# EAGLE board FunctionGenerator (EAGLE 5.10)
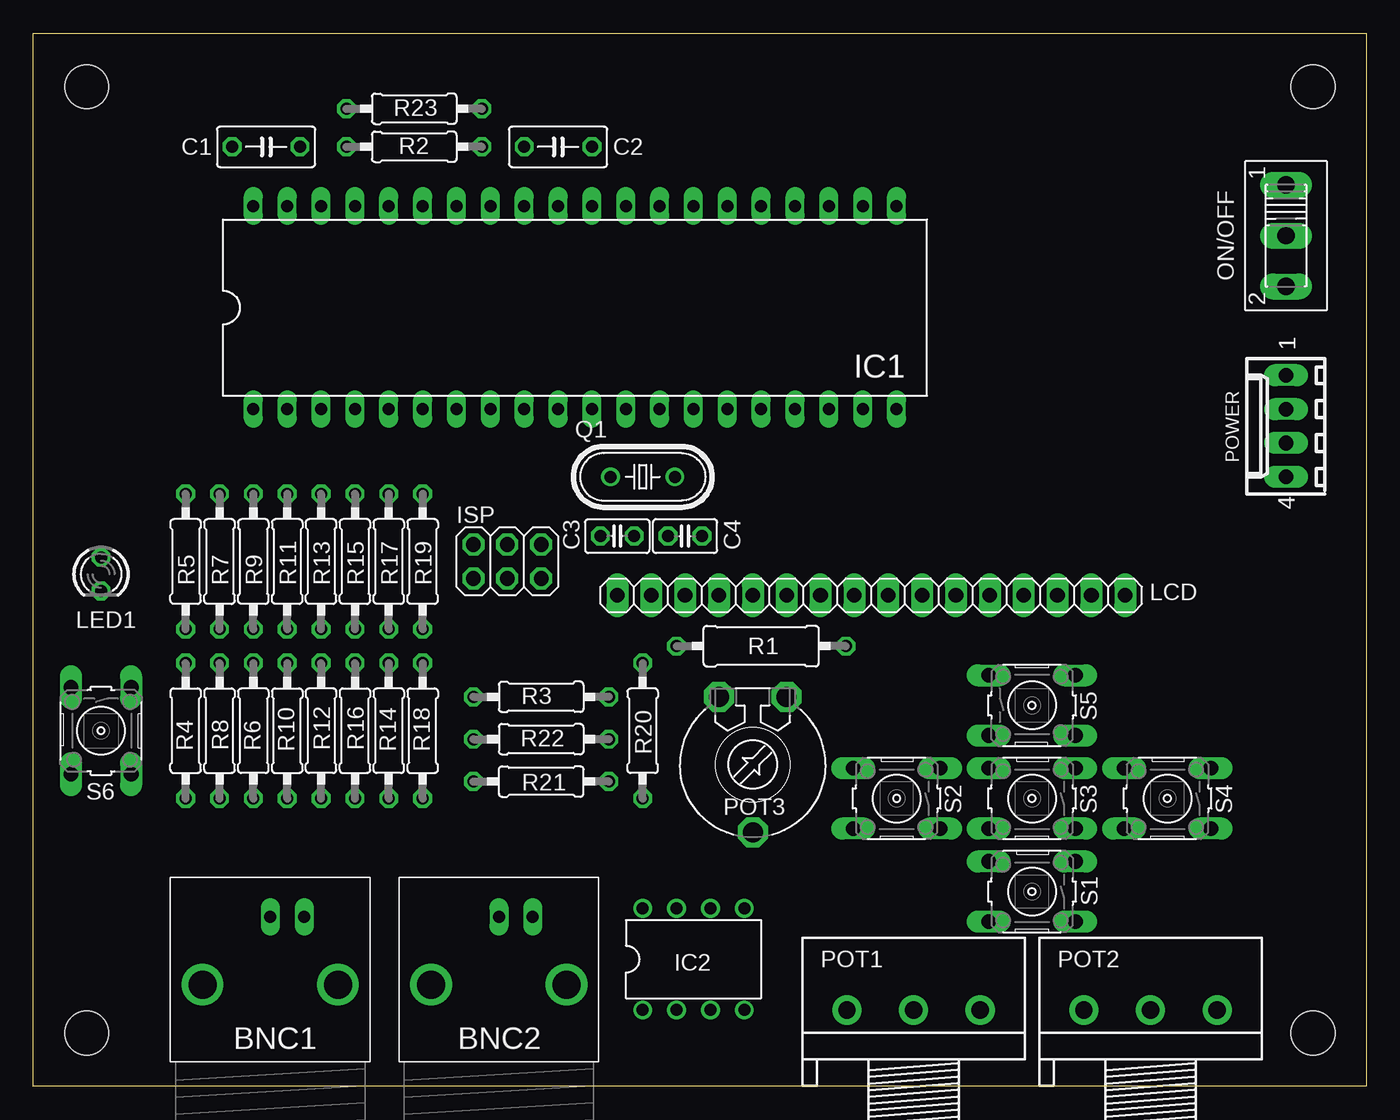
[diagram p0: board, top side]
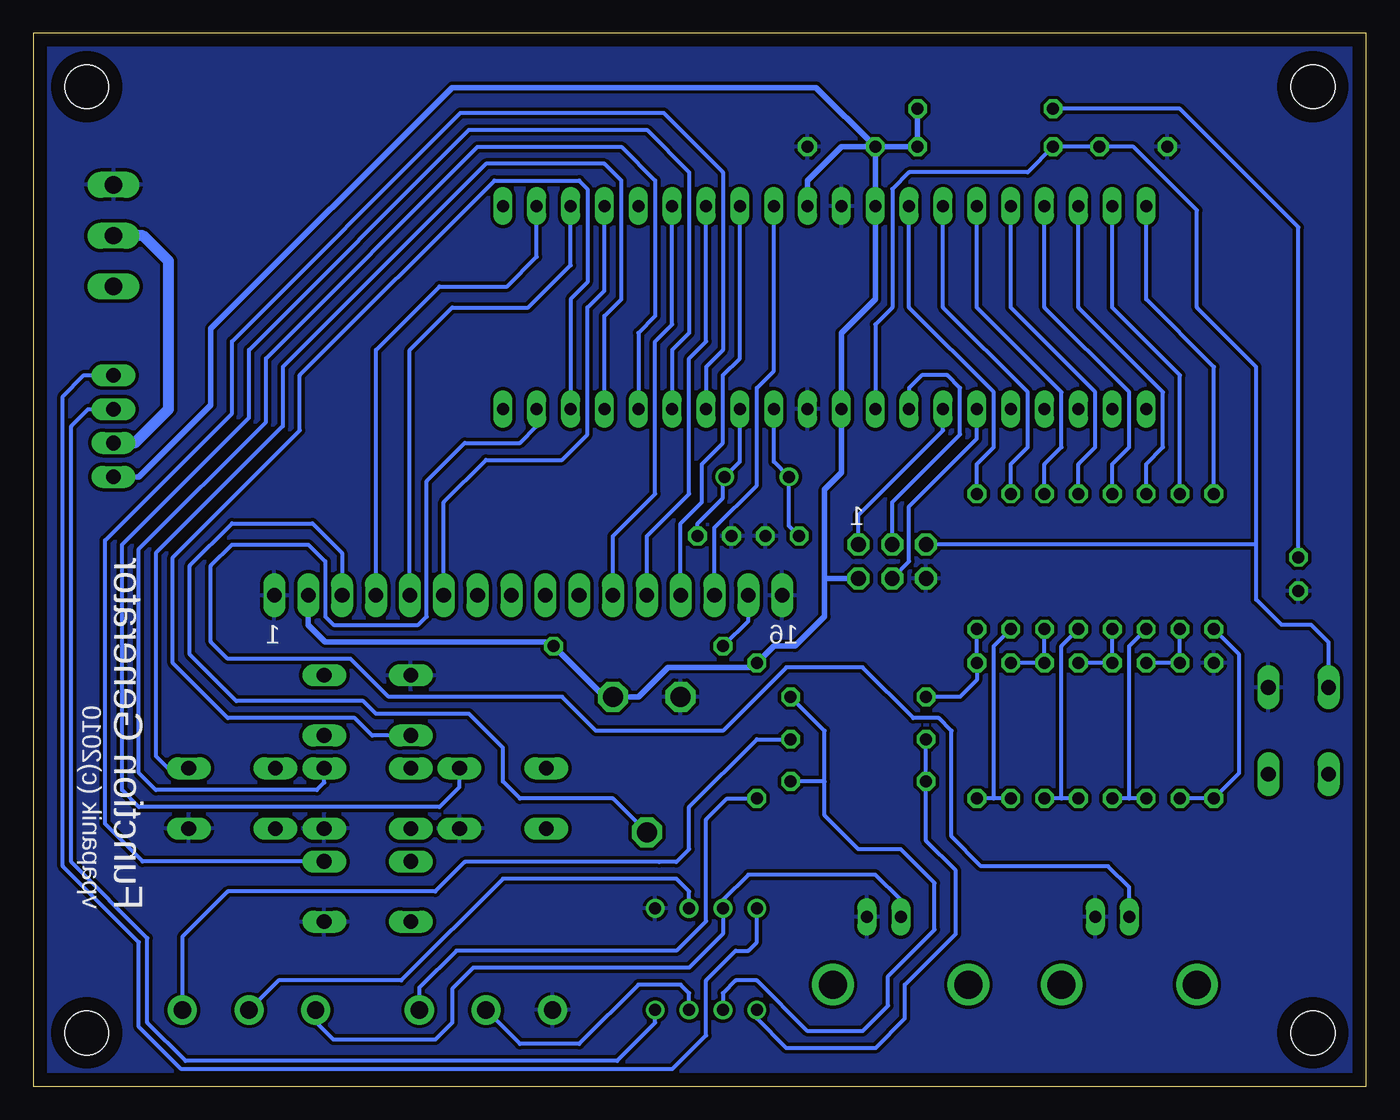
[diagram p1: board, bottom side, seen from below]

Size 100 x 79 mm. Coordinates in mm from the lower left corner, seen from the top.
Outline: 0,79 100,79 100,0 0,0 0,79
Copper layers (1*16): Top 0.035mm / dielectric 1.5mm / Bottom 0.035mm
Design rules "OLIMEX_10mils": minimum track width 10mil, minimum drill 24mil, track to track 10mil, track to pad 10mil, pad to pad 10mil, via to via 10mil, smd to smd 10mil, copper to edge 40mil, drill to drill 10mil, minimum pad ring 10mil, minimum via ring 8mil, stop-mask expansion 0mil, vias tented up to drill 0mil, thermal gap 10mil
Holes 3.3 mm at 4,75 96,75 96,4 4,4

## Footprints (pad centres in the part's own frame; a part is rotated, then mirrored left to right if it is on the bottom)
BNC = drill 2.1 round: 3 -5.08,5.08; 4 5.08,5.08 | drill 0.9 long: GND -2.54,0; S 0,0
C050-030X075 = drill 0.9 octagon: 1 -2.54,0; 2 2.54,0
C025-025X050 = drill 0.9 octagon: 1 -1.27,0; 2 1.27,0
DIL40 = drill 0.9 long: 1 -24.13,-7.62; 2 -21.59,-7.62; 3 -19.05,-7.62; 4 -16.51,-7.62; 5 -13.97,-7.62; 6 -11.43,-7.62; 7 -8.89,-7.62; 8 -6.35,-7.62; 9 -3.81,-7.62; 10 -1.27,-7.62; 11 1.27,-7.62; 12 3.81,-7.62; 13 6.35,-7.62; 14 8.89,-7.62; 15 11.43,-7.62; 16 13.97,-7.62; 17 16.51,-7.62; 18 19.05,-7.62; 19 21.59,-7.62; 20 24.13,-7.62; 21 24.13,7.62; 22 21.59,7.62; 23 19.05,7.62; 24 16.51,7.62; 25 13.97,7.62; 26 11.43,7.62; 27 8.89,7.62; 28 6.35,7.62; 29 3.81,7.62; 30 1.27,7.62; 31 -1.27,7.62; 32 -3.81,7.62; 33 -6.35,7.62; 34 -8.89,7.62; 35 -11.43,7.62; 36 -13.97,7.62; 37 -16.51,7.62; 38 -19.05,7.62; 39 -21.59,7.62; 40 -24.13,7.62
DIL08 = drill 0.9 pad 1.27 round: 1 -3.81,-3.81; 2 -1.27,-3.81; 3 1.27,-3.81; 4 3.81,-3.81; 5 3.81,3.81; 6 1.27,3.81; 7 -1.27,3.81; 8 -3.81,3.81
2X03 = drill 1.1 octagon: 1 -2.54,-1.27; 2 -2.54,1.27; 3 0,-1.27; 4 0,1.27; 5 2.54,-1.27; 6 2.54,1.27
1X16 = drill 1.1 long: 1 -19.05,0; 2 -16.51,0; 3 -13.97,0; 4 -11.43,0; 5 -8.89,0; 6 -6.35,0; 7 -3.81,0; 8 -1.27,0; 9 1.27,0; 10 3.81,0; 11 6.35,0; 12 8.89,0; 13 11.43,0; 14 13.97,0; 15 16.51,0; 16 19.05,0
LED3MM = drill 0.9 octagon: A -1.27,0; K 1.27,0
255SB = drill 1.3 long: 1 -3.81,0; 2 0,0; 3 3.81,0
3RP/1610N = drill 1.3 pad 2.184 round: 1 -5,0; 2 0,0; 3 5,0
LI10 = drill 1.5 octagon: A -2.54,-5.08; E 2.54,-5.08; S 0,5.08
6410-04 = drill 1.1 long: 1 3.81,0; 2 1.27,0; 3 -1.27,0; 4 -3.81,0
HC49U-V = drill 0.9 round: 1 -2.413,0; 2 2.413,0
0309/12 = drill 0.9 octagon: 1 -6.35,0; 2 6.35,0
0207/10 = drill 0.9 octagon: 1 -5.08,0; 2 5.08,0
B3F-10XX = drill 1.1 long: 1 -3.251,2.261; 2 3.251,2.261; 3 -3.251,-2.261; 4 3.251,-2.261

## Placement (x,y rotation side)
BNC1  BNCPTH  [BNC]  17.78,12.7 180 top
BNC2  BNCPTH  [BNC]  34.92,12.7 180 top
C1  0.1u  [C050-030X075]  17.46,70.48 0 top
C2  0.1u  [C050-030X075]  39.37,70.48 0 top
C3  18pF  [C025-025X050]  43.81,41.27 0 top
C4  18pF  [C025-025X050]  48.9,41.27 180 top
IC1  MEGA16-P  [DIL40]  40.64,58.42 0 top
IC2  LM358N  [DIL08]  49.53,9.53 0 top
ISP  [2X03]  35.56,39.37 180 top
LCD  [1X16]  62.87,36.83 180 top
LED1  GREEN  [LED3MM]  5.08,38.42 270 top
ON/OFF  [255SB]  93.98,63.82 270 top
POT1  1K  [3RP/1610N]  66.04,5.71 0 top
POT2  47K  [3RP/1610N]  83.82,5.71 0 top
POT3  10k  [LI10]  53.98,24.13 180 top
POWER  [6410-04]  93.98,49.53 90 top
Q1  16 MHz  [HC49U-V]  45.72,45.72 0 top
R1  470  [0309/12]  54.61,33.02 0 top
R2  10k  [0207/10]  28.57,70.48 180 top
R3  100k  [0207/10]  38.1,29.21 180 top
R4  20k  [0207/10]  11.43,26.67 270 top
R5  20k  [0207/10]  11.43,39.37 90 top
R6  10k  [0207/10]  13.97,26.67 270 top
R7  20k  [0207/10]  13.97,39.37 90 top
R8  10k  [0207/10]  16.51,26.67 90 top
R9  20k  [0207/10]  16.51,39.37 90 top
R10  10k  [0207/10]  19.05,26.67 270 top
R11  20k  [0207/10]  19.05,39.37 90 top
R12  10k  [0207/10]  21.59,26.67 90 top
R13  20k  [0207/10]  21.59,39.37 90 top
R14  10k  [0207/10]  24.13,26.67 270 top
R15  20k  [0207/10]  24.13,39.37 90 top
R16  10k  [0207/10]  26.67,26.67 90 top
R17  20k  [0207/10]  26.67,39.37 90 top
R18  10k  [0207/10]  29.21,26.67 270 top
R19  20k  [0207/10]  29.21,39.37 90 top
R20  100  [0207/10]  45.72,26.67 90 top
R21  100k  [0207/10]  38.1,22.86 0 top
R22  12k  [0207/10]  38.1,26.04 180 top
R23  150  [0207/10]  28.57,73.34 180 top
S1  DOWN  [B3F-10XX]  74.93,14.61 180 top
S2  LEFT  [B3F-10XX]  64.77,21.59 180 top
S3  START/STOP  [B3F-10XX]  74.93,21.59 180 top
S4  RIGHT  [B3F-10XX]  85.09,21.59 180 top
S5  UP  [B3F-10XX]  74.93,28.57 0 top
S6  RESET  [B3F-10XX]  5.08,26.67 270 top

## Library data of the parts
BNC1 BNC2 Q1 = SparkFun
C1-C4 R1-R23 = rcl
IC1 = atmel
IC2 = linear
ISP LCD = pinhead
LED1 = led
ON/OFF = switch
POT1-POT3 = pot
POWER = con-molex
S1-S6 = switch-omron

## Nets
+12V: IC2.8 POWER.1
-12V: IC2.4 POWER.2
BNC_DDS: BNC2.S IC2.7 POT2.1
BNC_DS: BNC1.S IC1.19
DDS_OUT: R3.2 R18.1 R19.1
DOWN: IC1.14 S1.3
GND: BNC1.GND BNC2.GND C1.1 C2.2 C3.2 C4.2 IC1.11 IC1.31 IC2.5 ISP.6 LCD.1 LCD.16 LED1.K ON/OFF.1 POT1.1 POT3.E R4.1 S1.1 S2.1 S3.1 S4.1 S5.1 S6.1
LCD_D4: IC1.26 LCD.11
LCD_D5: IC1.27 LCD.12
LCD_D6: IC1.28 LCD.13
LCD_D7: IC1.29 LCD.14
LCD_E: IC1.24 LCD.6
LCD_RS: IC1.22 LCD.4
LCD_RW: IC1.23 LCD.5
LEFT: IC1.15 S2.3
MISO: IC1.7 ISP.1
MOSI: IC1.6 ISP.4
N$1: IC1.40 R5.2
N$2: LCD.3 POT3.S
N$3: IC2.2 R3.1 R21.2
N$4: LED1.A R23.2
N$5: LCD.15 R1.1
N$6: IC1.39 R7.2
N$7: IC1.33 R19.2
N$8: IC1.34 R17.2
N$9: IC1.35 R15.2
N$10: IC1.36 R13.2
N$11: IC1.37 R11.2
N$12: IC1.38 R9.2
N$13: POT2.3 R22.1
N$14: IC2.3 POT1.2
N$15: R4.2 R5.1 R6.2
N$16: IC2.1 R21.1 R22.2
N$17: POT1.3 R20.1
N$18: R6.1 R7.1 R8.2
N$19: ON/OFF.2 POWER.3
N$20: R8.1 R9.1 R10.2
N$21: R10.1 R11.1 R12.2
N$22: R12.1 R13.1 R14.2
N$23: R14.1 R15.1 R16.2
N$24: R16.1 R17.1 R18.2
N$25: IC2.6 POT2.2
RESET: C1.2 IC1.9 ISP.5 R2.2 S6.3
RIGHT: IC1.17 S4.3
SCK: IC1.8 ISP.3
START/STOP: IC1.16 S3.3
UP: IC1.18 S5.3
VCC: C2.1 IC1.10 IC1.30 IC1.32 ISP.2 LCD.2 POT3.A POWER.4 R1.2 R2.1 R20.2 R23.1
XTAL1: C4.1 IC1.13 Q1.2
XTAL2: C3.1 IC1.12 Q1.1

## Tracks (layer width: path | path; a pad name or v marks a point on that pad's centre or on a via)
+12V
  Bottom 0.305: IC2.8 45.72,10.79 46.35,10.16 47.31,10.16 49.53,7.94 49.53,3.81 52.07,1.27 88.58,1.27 88.9,1.27 92.08,4.45 92.08,10.79 97.79,16.51 97.79,51.75 96.2,53.34 POWER.1
-12V
  Bottom 0.305: IC2.4 53.34,4.76 56.2,1.91 88.58,1.91 91.44,4.76 91.44,11.11 97.16,16.83 97.16,49.53 95.89,50.8 POWER.2
BNC_DDS
  Bottom 0.305: BNC2.S 34.92,13.97 36.83,15.88 46.35,15.88 48.26,13.97 IC2.7 48.26,11.43 50.8,8.89 66.99,8.89 68.58,7.3 68.58,4.76 69.85,3.49 77.47,3.49 78.82,4.84 POT2.1
BNC_DS
  Bottom 0.305: BNC1.S 17.78,14.92 19.37,16.51 28.89,16.51 31.11,18.73 31.11,26.67 32.07,27.62 33.97,27.62 37.78,31.43 43.5,31.43 48.26,26.67 57.78,26.67 60.33,29.21 73.34,29.21 76.2,32.07 85.41,32.07 86.68,33.34 86.68,39.05 85.09,40.64 79.38,40.64 78.11,39.37 78.11,35.24 77.47,34.61 71.12,34.61 70.48,35.24 70.48,45.4 67.63,48.26 63.5,48.26 62.23,49.53 IC1.19
DDS_OUT
  Bottom 0.305: R19.1 R18.1 29.21,30.48 30.48,29.21 R3.2
DOWN
  Bottom 0.305: IC1.14 49.53,53.98 48.26,55.24 48.26,68.58 52.7,73.03 67.94,73.03 85.09,55.88 85.09,50.48 94.61,40.96 94.61,19.68 91.8,16.87 S1.3
GND
  pour Bottom (isolate 0.254): 0,0 100,0 100,79 0,79
LCD_D4
  Bottom 0.305: IC1.26 52.07,57.15 53.34,55.88 53.34,44.45 56.52,41.27 LCD.11
LCD_D5
  Bottom 0.305: IC1.27 49.53,55.88 50.8,54.61 50.8,44.45 53.98,41.27 LCD.12
LCD_D6
  Bottom 0.305: IC1.28 46.99,54.61 48.26,53.34 48.26,48.26 49.85,46.67 49.85,43.81 51.44,42.23 LCD.13
LCD_D7
  Bottom 0.305: IC1.29 44.45,53.66 45.72,52.39 45.72,45.09 48.9,41.91 LCD.14
LCD_E
  Bottom 0.305: IC1.24 57.15,59.69 58.42,58.42 58.42,48.9 60.33,46.99 66.04,46.99 69.22,43.81 LCD.6
LCD_RS
  Bottom 0.305: IC1.22 62.23,62.23 64.45,60.01 69.53,60.01 74.3,55.24 LCD.4
LCD_RW
  Bottom 0.305: IC1.23 59.69,61.59 62.87,58.42 68.58,58.42 71.75,55.24 LCD.5
LEFT
  Bottom 0.305: IC1.15 52.07,55.24 50.8,56.52 50.8,68.58 53.98,71.75 67.31,71.75 83.82,55.24 83.82,50.16 93.34,40.64 93.34,22.23 92.08,20.95 69.53,20.95 68.02,22.47 S2.3
MISO
  Bottom 0.305: IC1.7 31.75,49.21 38.1,42.86 ISP.1
MOSI
  Bottom 0.305: IC1.6 29.21,48.58 34.29,43.5 34.29,39.37 ISP.4
N$1
  Bottom 0.305: R5.2 11.43,53.98 16.51,59.05 IC1.40
N$2
  Bottom 0.305: POT3.S 56.52,21.59 63.5,21.59 64.77,22.86 64.77,25.4 67.31,27.94 74.3,27.94 75.25,28.89 84.77,28.89 88.27,32.38 88.27,39.05 85.09,42.23 79.06,42.23 76.83,40.01 LCD.3
N$3
  Bottom 0.305: R3.1 40.64,26.67 40.64,22.86 | 40.64,22.86 R21.2 | 40.64,22.86 40.64,20.32 38.1,17.78 34.92,17.78 32.38,15.24 32.38,11.75 35.88,8.26 35.88,6.03 37.78,4.13 41.91,4.13 45.72,7.94 47.31,7.94 48.26,6.99 IC2.2
N$4
  Bottom 0.305: R23.2 13.97,73.34 5.08,64.45 LED1.A
N$5
  Bottom 0.305: LCD.15 46.35,34.92 R1.1
N$6
  Bottom 0.305: R7.2 13.97,53.34 19.05,58.42 IC1.39
N$7
  Bottom 0.305: R19.2 29.21,46.67 27.94,47.94 27.94,52.07 34.29,58.42 IC1.33
N$8
  Bottom 0.305: R17.2 26.67,46.67 25.4,47.94 25.4,52.07 31.75,58.42 IC1.34
N$9
  Bottom 0.305: R15.2 24.13,46.67 22.86,47.94 22.86,52.07 29.21,58.42 IC1.35
N$10
  Bottom 0.305: R13.2 21.59,46.67 20.32,47.94 20.32,52.07 26.67,58.42 IC1.36
N$11
  Bottom 0.305: R11.2 19.05,46.67 17.78,47.94 17.78,52.07 24.13,58.42 IC1.37
N$12
  Bottom 0.305: R9.2 16.51,46.67 15.24,47.94 15.24,52.07 21.59,58.42 IC1.38
N$13
  Bottom 0.305: POT2.3 88.82,11.19 85.41,14.61 69.85,14.61 67.63,16.83 53.02,16.83 51.75,16.83 50.8,17.78 50.8,20.95 45.72,26.04 R22.1
N$14
  Bottom 0.305: IC2.3 50.8,6.99 51.44,7.62 54.61,7.62 59.05,3.17 63.5,3.17 POT1.2
N$15
  Bottom 0.305: R5.1 9.53,32.38 9.53,23.5 R4.2 R6.2
N$16
  Bottom 0.305: R22.2 R21.1 33.02,18.41 30.8,16.19 30.8,11.43 34.61,7.62 34.61,5.08 36.83,2.86 43.5,2.86 45.72,5.08 IC2.1
N$17
  Bottom 0.305: POT1.3 71.04,7.38 68.26,10.16 51.75,10.16 49.53,12.38 49.53,20 47.94,21.59 R20.1
N$18
  Bottom 0.305: R7.1 R6.1 R8.2
N$19
  Bottom 0.813: ON/OFF.2 91.76,63.82 89.85,61.91 89.85,50.8 92.39,48.26 POWER.3
N$20
  Bottom 0.305: R9.1 17.78,33.02 17.78,21.59 | R8.1 17.78,21.59 | 17.78,21.59 R10.2
N$21
  Bottom 0.305: R11.1 R10.1 R12.2
N$22
  Bottom 0.305: R13.1 22.86,33.02 22.86,21.59 | R12.1 22.86,21.59 | 22.86,21.59 R14.2
N$23
  Bottom 0.305: R15.1 R14.1 R16.2
N$24
  Bottom 0.305: R17.1 27.94,33.02 27.94,21.59 | R16.1 27.94,21.59 | 27.94,21.59 R18.2
N$25
  Bottom 0.305: IC2.6 50.8,14.61 51.75,15.56 64.77,15.56 72.39,7.94 81.6,7.94 POT2.2
RESET
  Bottom 0.305: 8.26,40.64 ISP.5 | 8.26,40.64 8.26,53.98 12.7,58.42 12.7,65.72 17.46,70.48 C1.2 R2.2 25.4,68.58 34.29,68.58 35.56,67.31 35.56,58.42 36.83,57.15 IC1.9 | S6.3 2.82,33.3 4.13,34.61 6.35,34.61 8.26,36.51 8.26,40.64
RIGHT
  Bottom 0.305: IC1.17 57.15,57.78 55.88,59.05 55.88,67.94 57.15,69.22 66.04,69.22 81.28,53.98 81.28,49.53 90.81,40.01 90.81,24.77 89.89,23.85 S4.3
SCK
  Bottom 0.305: ISP.3 35.56,43.81 30.48,48.9 30.48,52.39 31.43,53.34 33.34,53.34 34.29,52.39 IC1.8
START/STOP
  Bottom 0.305: IC1.16 54.61,56.52 53.34,57.78 53.34,67.94 55.88,70.48 66.67,70.48 82.55,54.61 82.55,49.85 92.08,40.32 92.08,23.5 90.81,22.23 78.74,22.23 78.18,22.78 S3.3
UP
  Bottom 0.305: IC1.18 59.69,59.05 58.42,60.33 58.42,67.31 59.05,67.94 65.41,67.94 80.01,53.34 80.01,49.21 89.53,39.69 89.53,31.75 85.41,27.62 75.88,27.62 74.57,26.31 S5.3
VCC
  Bottom 0.406: C2.1 IC1.32 36.83,59.05 39.37,56.52 IC1.10 39.37,46.04 40.64,44.77 40.64,38.1 | 40.64,38.1 ISP.2 | C2.1 41.27,74.93 68.58,74.93 86.68,56.83 86.68,51.12 92.08,45.72 POWER.4 | C2.1 R2.1 R23.1 | LCD.2 79.38,34.61 78.11,33.34 61.28,33.34 R1.2 57.15,29.21 POT3.A 54.61,29.21 52.39,31.43 46.04,31.43 R20.2 44.45,33.02 42.86,33.02 40.64,35.24 40.64,38.1 | IC1.30 41.91,67.94 39.37,70.48 C2.1
XTAL1
  Bottom 0.305: IC1.13 46.99,46.86 Q1.2 48.26,45.59 48.26,44.13 50.16,42.23 C4.1
XTAL2
  Bottom 0.305: IC1.12 44.45,46.86 Q1.1 43.31,42.04 C3.1

## Text on the board
bNames: 1 | Function Generator | 16 | 1 | vpapanik (c)2010